# Altium PCB carriage_connector.PcbDoc
Units mil, origin at the board's own origin, x right, y up, seen from the top; angles counter-clockwise.
Board outline 3346.46 x 1375.98 mil, 2 copper layers (Top Layer, Bottom Layer), stack 65.792 mil thick; 8 components, 20 nets, 50 pads, 0 vias.
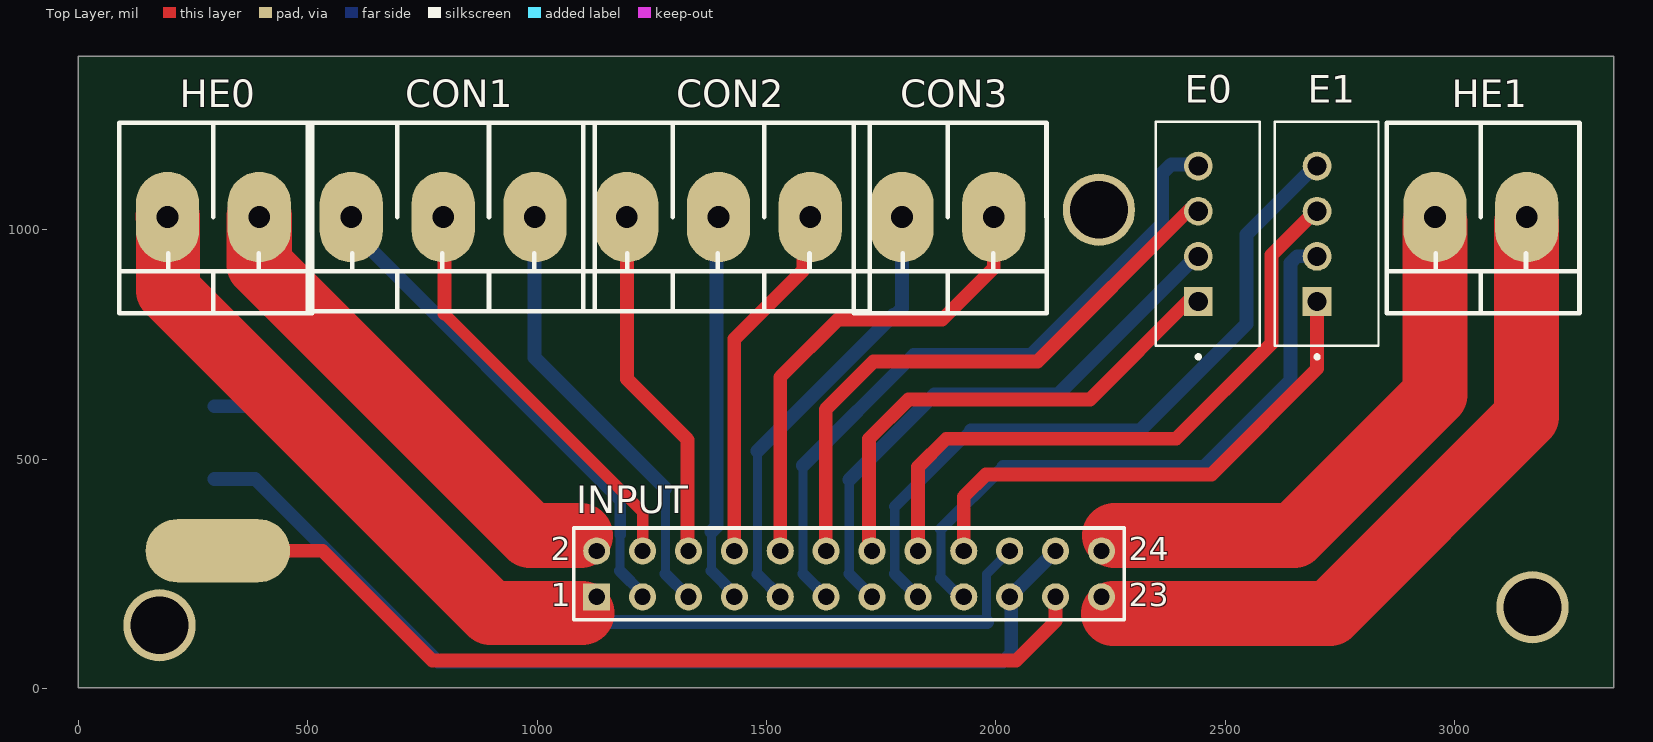
[diagram p0: Top Layer view]
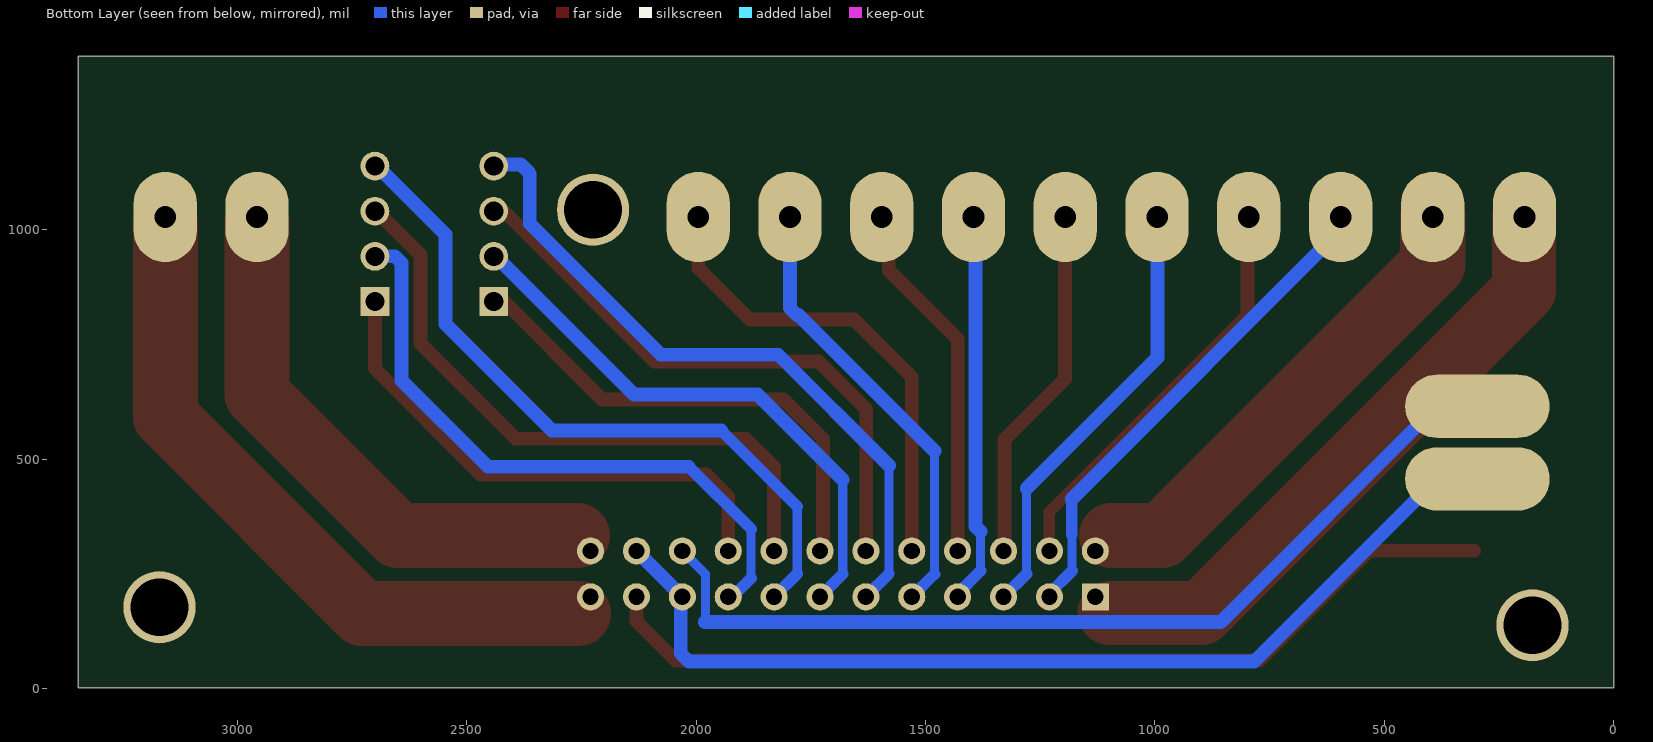
[diagram p1: Bottom Layer view, seen from below]
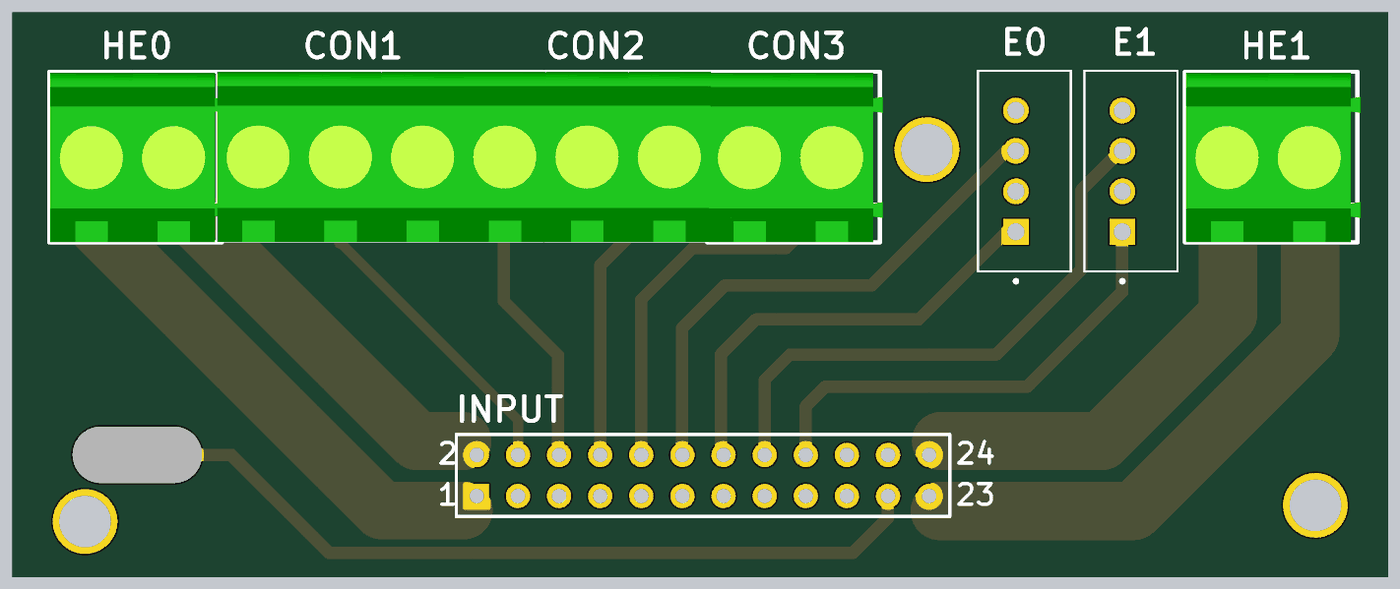
[diagram p2: 3D render of the assembled board from above, using the file's embedded part models]

## Layer stack, top to bottom
Top Solder: solder mask 0.4, Solder Resist, Dk 3.5
Top Layer: signal copper 1.4
Dielectric 1: dielectric 62.9921, FR-4, Dk 4.8
Bottom Layer: signal copper 1.4
Bottom Solder: solder mask 0.4, Solder Resist, Dk 3.5

## Board outline
0,1.97 3346.46,1.97 3346.46,1377.95 0,1377.95

## Design rules (kind name [scope] priority, off if disabled: settings)
Clearance [All] p1: gap=10 ignorepadtopadclearanceinfootprint=FALSE
PolygonConnect [All] p1: connectstyle=Relief reliefconductorwidth=10 reliefentries=4 polygonreliefangle="90 Angle" airgapwidth=10
RoutingVias [All] p1: holewidth=28 width=50 viastyle="Through Hole" minholewidth=28 minwidth=50 maxholewidth=28 maxwidth=50
SolderMaskExpansion [All] p1: expansion=4 istentingtop=FALSE
Width [All] p1: maxlimit=142 minlimit=10 preferedwidth=15.4
30 further rules are at their usual default settings.

## Components (designator, comment, footprint, x,y, rotation, side; value= is the part's Value field where it differs from the comment)
CON1 "KRE3vias" KRE3-3vias 795.28,1027.56 r0 top
CON2 "KRE3vias" KRE3-3vias 1395.28,1027.56 r0 top
CON3 "KRE2vias" KRE2-2vias 1895.28,1027.56 r0 top
E0 "B4B-XH-A(LF)(SN)" JST_B4B-XH-A(LF)(SN) 2440.94,843.33 r90 top
E1 "B4B-XH-A(LF)(SN)" JST_B4B-XH-A(LF)(SN) 2699.8,843.33 r90 top
HE0 "KRE2vias" KRE2-2vias 294.68,1027.56 r0 top
HE1 "KRE2vias" KRE2-2vias 3056.69,1027.56 r0 top
INPUT "Header 12X2" HDR2X12 1129.92,199.8 r0 top

## Footprints (in the part's own frame and the unit in brackets; to place one, negate y for a bottom-side part, rotate by r counter-clockwise, add the part's x,y. Pads: shape width x height; smd on the part's side, far side on the other; paste and mask are expansions set on the pad)
HDR2X12 [mm] "Connector; Header; 12x2 Position"
  rect 1.5x1.5 hole 0.9: 1(0,0)
  round 1.5 hole 0.9: 2(0,2.54) 3(2.54,0) 4(2.54,2.54) 5(5.08,0) 6(5.08,2.54) 7(7.62,0) 8(7.62,2.54) 9(10.16,0) 10(10.16,2.54) 11(12.7,0) 12(12.7,2.54) 13(15.24,0) 14(15.24,2.54) 15(17.78,0) 16(17.78,2.54) 17(20.32,0) 18(20.32,2.54) 19(22.86,0) 20(22.86,2.54) 21(25.4,0) 22(25.4,2.54) 23(27.94,0) 24(27.94,2.54)
  silkscreen extent -1.27,-1.27 29.21,3.81
JST_B4B-XH-A(LF)(SN) [mm]
  rect 1.59x1.59 hole 1.06: 1(0,0)
  round 1.59 hole 1.06: 2(2.5,0) 3(5,0) 4(7.5,0)
  silkscreen extent -3.16,-3.4 9.95,2.35
KRE2-2vias [mm]
  oval 3.5x5 hole 1.2: 1(-2.54,0) 2(2.54,0)
  silkscreen extent -5.21,-5.33 5.46,5.21, body extent -5.13,-5.33 5.63,5.17, height 14.35
KRE3-3vias [mm]
  oval 3.5x5 hole 1.2: 1(-5.08,0) 2(0,0) 3(5.08,0)
  silkscreen extent -7.49,-5.21 8.38,5.21, body extent -7.54,-5.29 8.3,5.21, height 14.35

## Part data
CON1 CON2: "Conector 3 vias", Descrição="Conector KRE 3 vias 180º", Encapsulamento="PTH - 180º", Modelo="3 vias - 180º"
CON3 HE0 HE1: "Conector 2 vias", Descrição="Conector KRE 2 vias 180º", Encapsulamento="PTH - 180º", Modelo="2 vias - 180º"
E0 E1: "Connector Header Through Hole 4 position 0.098 _2.50mm_", Package=None, Availability=Unavailable, MF="JST Sales", MP=B4B-XH-A_LF__SN_, Price=None, SnapEDA_Link=https://www.snapeda.com/parts/B4B-XH-A%28LF%29%28SN%29/JST%20Sales%20America%20Inc./view-part/447494/?ref=snap
INPUT: "Header, 12-Pin, Dual row", LatestRevisionDate=17-Jul-2002, LatestRevisionNote="Re-released for DXP Platform.", Publisher="Altium Limited"

## Free pads (board coordinates)
  oval 314.96x137.8 smd far side: 5v(297.24,456.69) GND(297.24,615.16)
  oval 314.96x137.8 smd: 12v(304.13,300.2)
  round 157.48 hole 125.98: M3(177.17,137.8) M3(2224.41,1043.31) M3(3169.29,177.17)

## Nets (pads, with @x,y where several pads share a name; then routed paths per layer and width w, separated by ;. In a path a pad name is that pad's centre, name@x,y a point inside that pad or via, vN(x,y) a via of type N, cw(c..) or ccw(c..) an arc to the next point about the centre after c; other vN are vias at no path point)
NetCON1_1: CON1.1 INPUT.3 | length 1092.2
  Bottom Layer w20: 1180.39,256.61 1180.39,333.94 1181.1,334.65
  Bottom Layer w25: 1180.39,256.61 1229.92,207.09 INPUT.3 ; 1181.1,334.65 1181.1,413.19
  Bottom Layer w30: CON1.1@595.28,1028.54 595.28,999.02 1181.1,413.19
NetCON1_2: CON1.2 INPUT.4 | length 908.8
  Top Layer w25: 798.23,816.93 1229.92,385.24 INPUT.4
  Top Layer w30: CON1.2@795.28,1028.54 798.23,1025.59 798.23,816.93
NetCON1_3: CON1.3 INPUT.5 | length 968.3
  Bottom Layer w20: 1279.53,250.2 1279.53,436.02
  Bottom Layer w25: 1279.53,250.2 INPUT.5
  Bottom Layer w30: CON1.3@995.28,1028.54 994.09,1027.36 994.09,721.46 1279.53,436.02
NetCON2_1: CON2.1 INPUT.6 | length 783.5
  Top Layer w25: INPUT.6@1327.76,301.97 INPUT.6
  Top Layer w30: CON2.1 1195.87,1026.97 1195.87,674.21 1327.76,542.32 INPUT.6@1327.76,301.97
NetCON2_2: CON2.2 INPUT.7 | length 854.9
  Bottom Layer w20: 1379.78,341.94 1379.92,341.8 1379.92,256.37
  Bottom Layer w25: 1379.92,256.37 1429.92,206.37 INPUT.7
  Bottom Layer w30: 1379.78,341.94 1390.75,352.91 1390.75,1023.03 CON2.2
NetCON2_3: CON2.3 INPUT.8 | length 791.3
  Top Layer w30: INPUT.8 1429.92,761.61 1580.27,911.96 1580.27,1027.91 CON2.3@1580.91,1028.54
NetCON3_1: CON3.1 INPUT.9 | length 1023.5
  Bottom Layer w20: 1480.32,249.41 1480.32,517.72
  Bottom Layer w25: 1480.32,249.41 INPUT.9
  Bottom Layer w30: 1480.32,517.72 1776.58,813.98 1780.63,813.98 1795.28,828.62 CON3.1@1795.28,1069.96
NetCON3_2: CON3.2 INPUT.10 | length 1054.7
  Top Layer w30: INPUT.10 1529.92,678.54 1655.51,804.13 1882.87,804.13 1995.28,916.54 CON3.2@1995.28,1028.54
NetE0_1: E0.1 INPUT.14 | length 1089.9
  Top Layer w25: INPUT.14@1723.43,306.3 INPUT.14
  Top Layer w30: INPUT.14@1723.43,306.3 1723.43,544.29 1809.06,629.92 2204.72,629.92 2421.26,846.46 E0.1@2440.94,846.46
NetE0_2: E0.2 INPUT.13 | length 1239.4
  Bottom Layer w20: 1680.12,249.6 1680.12,454.72
  Bottom Layer w25: 1680.12,249.6 INPUT.13
  Bottom Layer w30: 1680.12,454.72 1866.14,640.75 2134.84,640.75 2438.98,944.88 E0.2@2440.94,944.88
NetE0_3: E0.3 INPUT.12 | length 1301.1
  Top Layer w25: INPUT.12@1628.94,300.79 INPUT.12
  Top Layer w30: INPUT.12@1628.94,300.79 1628.94,608.27 1733.27,712.6 2090.55,712.6 2421.26,1043.31 E0.3@2440.94,1043.31
NetE0_4: E0.4 INPUT.11 | length 1503.9
  Bottom Layer w20: 1579.73,250 1579.73,486.22
  Bottom Layer w25: 1579.73,250 INPUT.11
  Bottom Layer w30: 1579.73,486.22 1820.87,727.36 2076.77,727.36 2362.2,1012.8 2362.2,1122.05 2381.89,1141.73 E0.4@2440.94,1141.73
NetE1_1: E1.1 INPUT.18 | length 1145.7
  Top Layer w30: INPUT.18 1929.92,418.11 1978.35,466.54 2469.49,466.54 2699.8,696.85 E1.1@2699.8,838.86
NetE1_2: E1.2 INPUT.17 | length 1389.3
  Bottom Layer w20: 1879.92,240.66 1879.92,347.44
  Bottom Layer w25: 1879.92,240.66 1920.78,199.8 INPUT.17 ; 1879.92,347.44 2015.75,483.27
  Bottom Layer w30: 2015.75,483.27 2453.74,483.27 2641.73,671.26 2641.73,927.35 2656.38,941.99 E1.2@2699.2,941.99
NetE1_3: E1.3 INPUT.16 | length 1398.3
  Top Layer w30: INPUT.16 1829.92,482.48 1891.73,544.29 2392.72,544.29 2600.39,751.97 2600.39,944.88 E1.3@2699.8,1044.29
NetE1_4: E1.4 INPUT.15 | length 1561.2
  Bottom Layer w20: 1779.53,250.2 1779.53,396.65
  Bottom Layer w25: 1779.53,250.2 INPUT.15 ; 1779.53,396.65 1944.88,562.01
  Bottom Layer w30: 1944.88,562.01 2313.98,562.01 2546.26,794.29 2546.26,989.17 E1.4@2699.8,1142.72
NetHE0_1: HE0.1 INPUT.1 | length 1355.4
  Top Layer w140: HE0.1@194.69,1028.41 195.79,1027.3 195.79,867.2 898.62,164.37 1098.43,164.37
NetHE0_2: HE0.2 INPUT.2 | length 1048.6
  Top Layer w142: HE0.2@394.69,1028.41 394.69,924.21 985.24,333.66 1094.49,333.66
NetHE1_1: HE1.1 INPUT.24 | length 1200.1
  Top Layer w142: 2258.94,333.66 2649.61,333.66 2956.69,640.75 HE1.1@2956.69,1015.88
NetHE1_2: HE1.2 INPUT.23 | length 1500.1
  Top Layer w142: 2255.91,163.37 2727.35,163.37 3156.5,592.52 HE1.2@3156.5,1014.23
pads on no net: INPUT.19 INPUT.20 INPUT.21 INPUT.22
copper on no net: | length 6242.7
  Top Layer w30: 304.13,300.2 532.48,300.2 771.65,61.02 2044.29,61.02 2129.92,146.65 2129.92,199.8
  Bottom Layer w20: 1979.45,144.69 1979.45,249.33 2029.92,299.8
  Bottom Layer w30: 297.24,456.69 385.83,456.69 783.46,59.06 2015.89,59.06 2033.46,76.63 2033.46,196.26 2029.92,199.8 2129.92,299.8 ; 297.24,615.16 385.83,615.16 856.3,144.69 1981.3,144.69

## Text inside footprints (layer, text, board x,y; h text height)
INPUT: Top Overlay "24" at 2289.92,279.8 h50; Top Overlay "23" at 2289.92,179.8 h50; Top Overlay "2" at 1029.92,279.8 h50; Top Overlay "1" at 1029.92,179.8 h50